# Altium PCB pcb.PcbDoc
Units mil, origin at the board's own origin, x right, y up, seen from the top; angles counter-clockwise.
Board outline 6000 x 4000 mil, 2 copper layers (Top Layer, Bottom Layer); 24 components, 16 nets, 61 pads, 0 vias.
Unrouted connection lines stored in the file: 38.
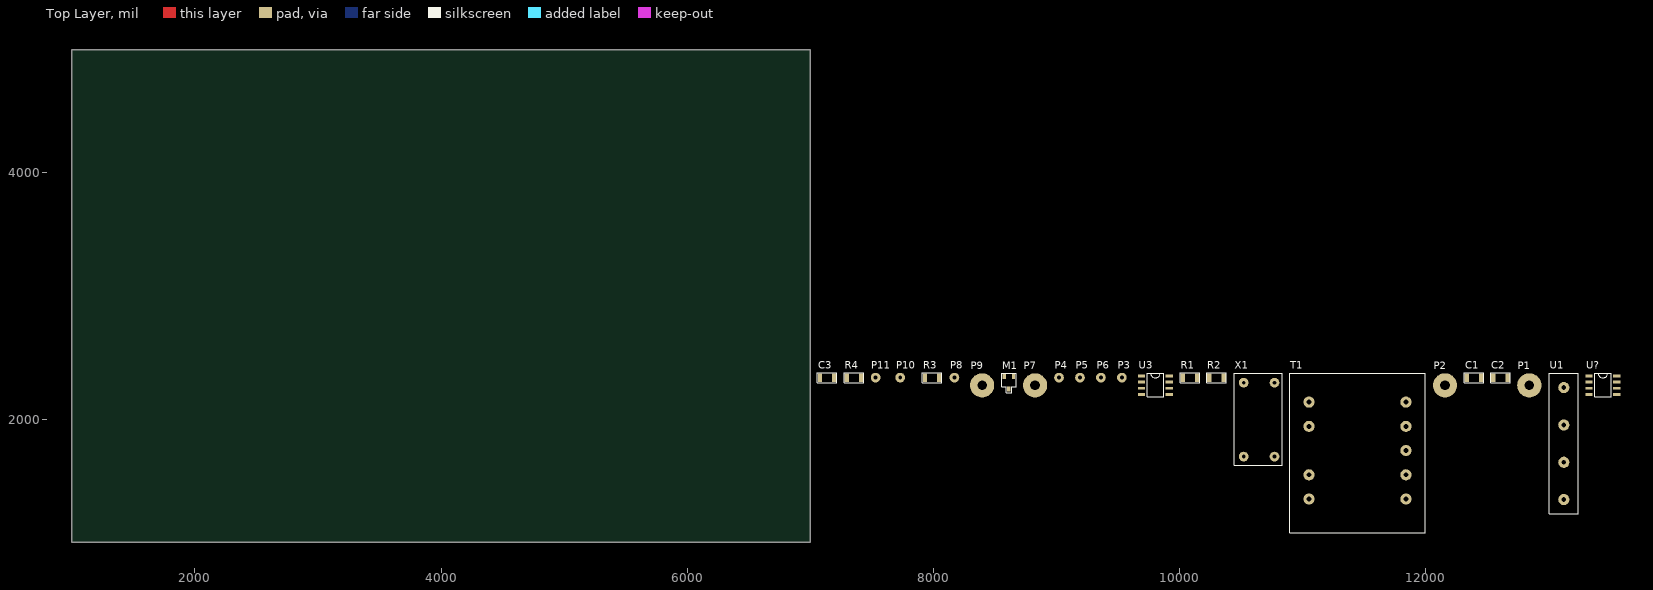
[diagram p0: Top Layer view]
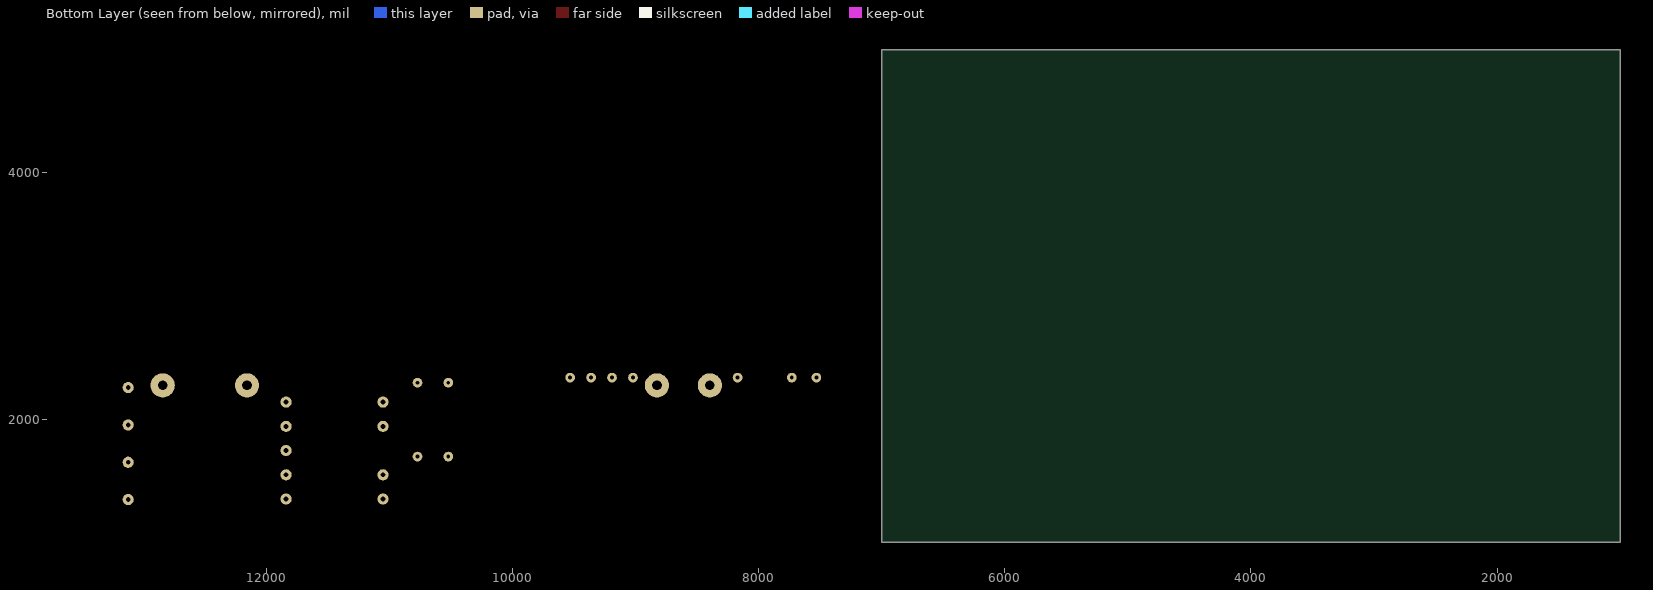
[diagram p1: Bottom Layer view, seen from below]

## Layer stack, top to bottom
Top Solder: solder mask 0.4, Solder Resist, Dk 3.5
Top Layer: signal copper 1.4
Dielectric 1: dielectric 12.6, FR-4, Dk 4.8
Bottom Layer: signal copper 1.4
Bottom Solder: solder mask 0.4, Solder Resist, Dk 3.5

## Board outline
1000,1000 7000,1000 7000,5000 1000,5000

## Design rules (kind name [scope] priority, off if disabled: settings)
Clearance [All] p1: gap=10
PolygonConnect [All] p1: connectstyle=Relief reliefconductorwidth=10 reliefentries=4 polygonreliefangle="90 Angle" airgapwidth=10
RoomDefinition schemat [InComponentClass('schemat')] p1: confinementstyle=ConfineIn formatcopy=TRUE lockcomponents=FALSE outline 7045,1060 13590,1060 13590,2485 7045,2485
RoutingVias [All] p1: holewidth=28 width=50 viastyle="Through Hole" minholewidth=28 minwidth=50 maxholewidth=28 maxwidth=50
SolderMaskExpansion [All] p1: expansion=4
Width [All] p1: maxlimit=10 minlimit=10 preferedwidth=10
30 further rules are at their usual default settings.

## Components (designator, comment, footprint, x,y, rotation, side; value= is the part's Value field where it differs from the comment)
C1 "Capacitor" 1206C 12390,2335 r0 top
C2 "Capacitor" 1206C 12605,2335 r0 top
C3 "Capacitor" 1206C 7135,2335 r0 top
M1 "NMOS" SOT23-3 8650,2345 r0 top
P1 "PAD_THT" PAD_2mm 12840,2470 r0 top
P2 "PAD_THT" PAD_2mm 12155,2470 r0 top
P3 "PAD_THT" PAD_0.8mm 9530,2730 r0 top
P4 "PAD_THT" PAD_0.8mm 9020,2730 r0 top
P5 "PAD_THT" PAD_0.8mm 9190,2730 r0 top
P6 "PAD_THT" PAD_0.8mm 9360,2730 r0 top
P7 "PAD_THT" PAD_2mm 8825,2470 r0 top
P8 "PAD_THT" PAD_0.8mm 8170,2730 r0 top
P9 "PAD_THT" PAD_2mm 8395,2470 r0 top
P10 "PAD_THT" PAD_0.8mm 7730,2730 r0 top
P11 "PAD_THT" PAD_0.8mm 7530,2730 r0 top
R1 "Resistor" 1206R 10020,2335 r0 top
R2 "Resistor" 1206R 10235,2335 r0 top
R3 "Resistor" 1206R 7925,2335 r0 top
R4 "Resistor" 1206R 7290,2335 r0 top
T1 "TEZ1.5/D/6V" TEZ1.6 11050,1350 r90 top
U1 "RECTIFIER" GBJ4 13120,2255 r0 top
U3 "ATtiny13A" SOIC8 9690,2350 r0 top
U? "LM78L05" SOIC8 13325,2350 r0 top
X1 "Relay" JV-KT 10520,2295 r0 top

## Footprints (in the part's own frame and the unit in brackets; to place one, negate y for a bottom-side part, rotate by r counter-clockwise, add the part's x,y. Pads: shape width x height; smd on the part's side, far side on the other; paste and mask are expansions set on the pad)
1206C [mm]
  rect 0.9x1.7 smd: 1(-1.45,0) 2(1.5,0)
  silkscreen extent -2,-1 2.05,1, body extent -1.6,-0.8 1.6,0.8, height 1
1206R [mm]
  rect 0.9x1.7 smd: 1(0.15,0) 2(3.1,0)
  silkscreen extent -0.4,-1 3.65,1, body extent 0,-0.8 3.2,0.8, height 1
GBJ4 [mm]
  round 2.3 hole 1: 1(0,0) 2(0,-7.7) 3(0,-15.4) 4(0,-23.1)
  silkscreen extent -3,-26 3,3
JV-KT [mm] "Relay"
  round 2 hole 0.8: 1(6.35,0) 2(6.35,-15.24) 3(0,-15.24) 4(0,0)
  silkscreen extent -2,-17 8,2
PAD_0.8mm [mm]
  round 2 hole 0.8: 1(0,-10)
PAD_2mm [mm]
  round 5 hole 2: 1(0,-5)
SOIC8 [mm]
  rrect50% 1.5x0.6 smd: 1(0,0)
  rect 1.5x0.6 smd: 2(0,-1.27) 3(0,-2.54) 4(0,-3.81) 5(5.7,-3.81) 6(5.7,-2.54) 7(5.7,-1.27) 8(5.7,0)
  silkscreen extent 1.14,-4.32 4.57,0.6, body extent -0.16,-4.41 5.86,0.6, height 1.75
SOT23-3 [mm]
  rect 0.7x1 smd: 1(0,0) 2(-1.9,0) 3(-0.95,-2.6)
  silkscreen extent -2.45,-3.32 0.55,0.7, body extent -2.45,-2.62 0.55,0.02, height 1.08
TEZ1.6 [mm]
  round 2.3 hole 1: 1(0,0) 2(5,0) 4(15,0) 5(20,0) 6(20,-20) 7(15,-20) 8(10,-20) 9(5,-20) 10(0,-20)
  silkscreen extent -7,-24 26,4

## Nets (pads, with @x,y where several pads share a name; then routed paths per layer and width w, separated by ;. In a path a pad name is that pad's centre, name@x,y a point inside that pad or via, vN(x,y) a via of type N, cw(c..) or ccw(c..) an arc to the next point about the centre after c; other vN are vias at no path point)
GND: C1.1 C2.1 C3.1 M1.2 P10.1 R3.1 U1.4 U3.4 U?.2 U?.3 U?.6 U?.7
NetC1_2: C1.2 U1.1 U?.8
NetM1_1: M1.1 R4.2
NetM1_3: M1.3 X1.1
NetP1_1: P1.1 T1.1 X1.3
NetP2_1: P2.1 P9.1 T1.5
NetP3_1: P3.1 R2.1 U3.1
NetP4_1: P4.1 U3.7
NetP5_1: P5.1 U3.6
NetP6_1: P6.1 R4.1 U3.5
NetP7_1: P7.1 X1.2
NetP8_1: P8.1 U3.3
NetR1_1: R1.1 R3.2 U3.2
NetT1_7: T1.7 U1.3
NetT1_9: T1.9 U1.2
VCC: C2.2 C3.2 P11.1 R1.2 R2.2 U3.8 U?.1 X1.4
pads on no net: T1.2 T1.4 T1.6 T1.8 T1.10 U?.4 U?.5